# Altium PCB PCB1.PcbDoc (part 6 of 7)
Units mil, origin at the board's own origin, x right, y up, seen from the top; angles counter-clockwise.
Board outline 7650 x 4400 mil, 2 copper layers (Top Layer, Bottom Layer); 123 components, 190 nets, 788 pads, 165 vias.
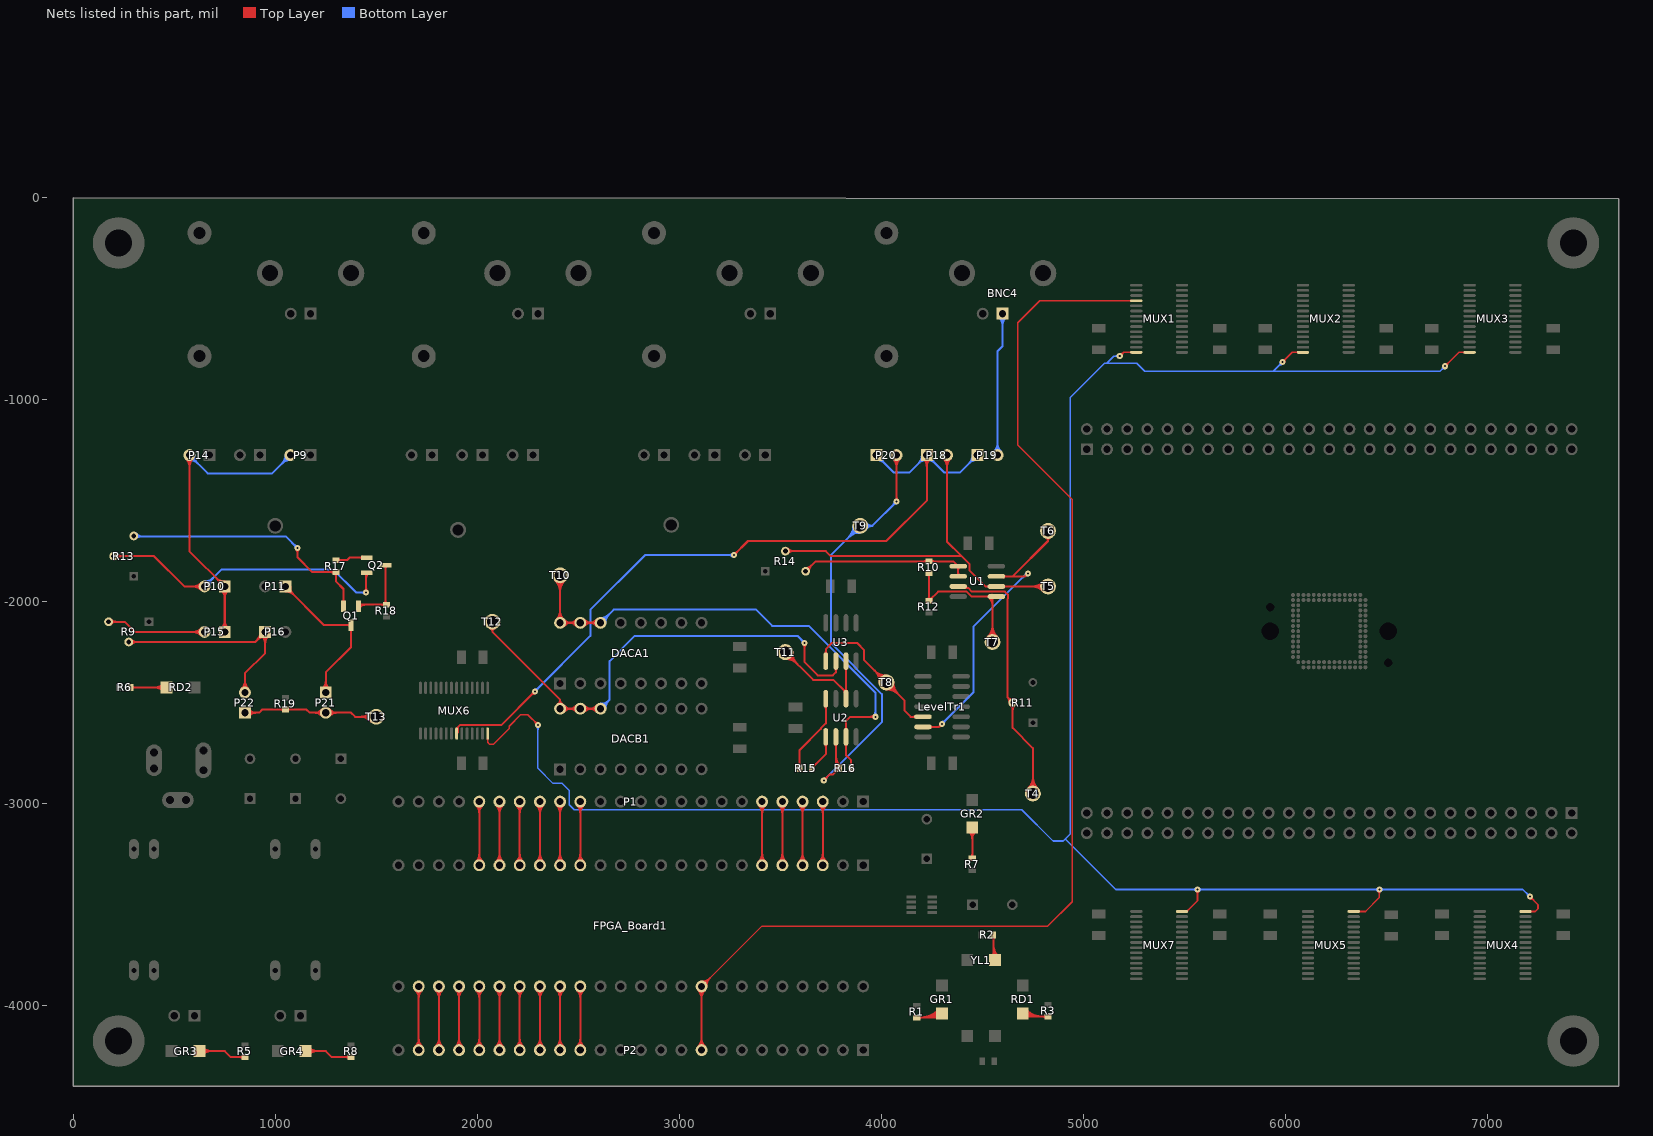
[diagram p6: the nets of this part, all layers, seen from the top]

## Via types
v1: diameter 30, hole 10, Top Layer to Bottom Layer, 118 vias
v2: diameter 20, hole 6, Top Layer to Bottom Layer, 47 vias

## Nets (pads, with @x,y where several pads share a name; then routed paths per layer and width w, separated by ;. In a path a pad name is that pad's centre, name@x,y a point inside that pad or via, vN(x,y) a via of type N, cw(c..) or ccw(c..) an arc to the next point about the centre after c; other vN are vias at no path point) (continued)
NetBNC4_1: BNC4.1 P19.2 | length 1006.6
  Bottom Layer w10: P19.2@4557.66,-1257.66 ccw(c4515.79,-1215.79) 4575,-1215.79 ccw(c4634.21,-1215.79) P19.2@4592.34,-1257.66 ; P19.2@4564.73,-1264.73 ccw(c4539.93,-1239.93) 4575,-1239.93 ccw(c4610.07,-1239.93) P19.2@4585.27,-1264.73 ; P19.2@4575,-1275 4575,-760 4600,-735 BNC4.1@4600,-575 ; BNC4.1@4582.66,-592.34 cw(c4540.79,-634.21) 4600,-634.21 cw(c4659.21,-634.21) BNC4.1@4617.34,-592.34 ; BNC4.1@4589.73,-585.27 cw(c4564.93,-610.07) 4600,-610.07 cw(c4635.07,-610.07) BNC4.1@4610.27,-585.27
NetDACA1_14: DACA1.14 DACA1.15 DACA1.16 R16.1 T10.1 U2.3 | length 3782.6
  Top Layer w10: T10.1@2385.7,-1894.3 cw(c2327.02,-1952.98) 2410,-1952.98 cw(c2492.98,-1952.98) T10.1@2434.3,-1894.3 ; DACA1.16@2392.66,-2087.66 ccw(c2350.78,-2045.79) 2410,-2045.79 ccw(c2469.21,-2045.79) 2427.34,-2087.66 ccw(c2469.21,-2045.79) 2469.21,-2105 ccw(c2469.21,-2164.22) DACA1.16@2427.34,-2122.34 ; T10.1@2392.77,-1887.23 cw(c2351.17,-1928.83) 2410,-1928.83 cw(c2468.84,-1928.84) T10.1@2427.23,-1887.23 ; DACA1.16@2399.73,-2094.73 ccw(c2374.93,-2069.93) 2410,-2069.93 ccw(c2445.07,-2069.93) 2420.27,-2094.73 ccw(c2445.07,-2069.93) 2445.07,-2105 ccw(c2445.07,-2140.07) DACA1.16@2420.27,-2115.27 ; T10.1@2410,-1870 DACA1.16@2410,-2105 DACA1.15@2510,-2105 DACA1.14@2610,-2105 ; DACA1.15@2492.66,-2122.34 ccw(c2450.78,-2164.22) 2450.78,-2105 ccw(c2450.78,-2045.79) DACA1.15@2492.66,-2087.66 ; DACA1.15@2499.73,-2115.27 ccw(c2474.93,-2140.07) 2474.93,-2105 ccw(c2474.93,-2069.93) DACA1.15@2499.73,-2094.73 ; DACA1.15@2520.27,-2115.27 cw(c2545.07,-2140.07) 2545.07,-2105 cw(c2545.07,-2069.93) DACA1.15@2520.27,-2094.73 ; DACA1.15@2527.34,-2122.34 cw(c2569.21,-2164.22) 2569.21,-2105 cw(c2569.21,-2045.79) DACA1.15@2527.34,-2087.66 ; DACA1.14@2592.66,-2122.34 ccw(c2550.78,-2164.22) 2550.78,-2105 ccw(c2550.78,-2045.79) DACA1.14@2592.66,-2087.66 ; DACA1.14@2599.73,-2115.27 ccw(c2574.93,-2140.07) 2574.93,-2105 ccw(c2574.93,-2069.93) DACA1.14@2599.73,-2094.73 ; U2.3@3820.18,-2705.8 cw(c3808.56,-2717.43) 3825,-2717.43 cw(c3841.44,-2717.43) U2.3@3829.82,-2705.8 ; U2.3@3820.18,-2633.18 ccw(c3808.56,-2621.55) 3825,-2621.55 ccw(c3841.44,-2621.55) U2.3@3829.82,-2633.18 ; R16.1@3843.79,-2814.85 ccw(c3828.8,-2799.87) 3850,-2799.87 ccw(c3871.2,-2799.87) R16.1@3856.21,-2814.85 ; R16.1@3850,-2825 3850,-2785 3825,-2760 U2.3@3825,-2669.49 3825,-2590 3845,-2570 v1(3970,-2570) ; v1@3962.93,-2577.07 ccw(c3945.86,-2594.14) 3945.86,-2570 ccw(c3945.86,-2545.86) v1@3962.93,-2562.93
  Bottom Layer w10: DACA1.14@2610,-2105 2675,-2040 3380,-2040 3460,-2120 3640,-2120 3970,-2450 v1(3970,-2570) ; DACA1.14@2610,-2090.47 ccw(c2610,-2055.4) 2634.8,-2080.2 ccw(c2659.6,-2105) DACA1.14@2624.53,-2105 ; DACA1.14@2610,-2080.47 ccw(c2610,-2021.26) 2651.87,-2063.13 ccw(c2693.74,-2105) DACA1.14@2634.53,-2105 ; v1@3962.93,-2562.93 ccw(c3945.86,-2545.86) 3970,-2545.86 ccw(c3994.14,-2545.86) v1@3977.07,-2562.93
NetDACB1_14: DACB1.14 DACB1.15 DACB1.16 T12.1 U3.2 | length 3338.7
  Top Layer w10: T12.1@2062.69,-2132.09 cw(c2055.82,-2150) 2075,-2150 ; T12.1@2075,-2100 2075,-2150 ; T12.1@2087.31,-2132.09 ccw(c2094.18,-2150) 2075,-2150 ; DACB1.16@2396.71,-2509.39 ccw(c2380.99,-2485) 2410,-2485 ; DACB1.16@2420.27,-2540.27 cw(c2445.07,-2565.07) 2445.07,-2530 cw(c2445.07,-2494.93) DACB1.16@2420.27,-2519.73 ; DACB1.16@2423.29,-2509.39 cw(c2439.01,-2485) 2410,-2485 ; DACB1.16@2427.34,-2547.34 cw(c2469.21,-2589.21) 2469.21,-2530 cw(c2469.21,-2470.79) DACB1.16@2427.34,-2512.66 ; DACB1.15@2492.66,-2547.34 ccw(c2450.79,-2589.21) 2450.79,-2530 ccw(c2450.79,-2470.79) DACB1.15@2492.66,-2512.66 ; DACB1.15@2499.73,-2540.27 ccw(c2474.93,-2565.07) 2474.93,-2530 ccw(c2474.93,-2494.93) DACB1.15@2499.73,-2519.73 ; DACB1.15@2520.27,-2540.27 cw(c2545.07,-2565.07) 2545.07,-2530 cw(c2545.07,-2494.93) DACB1.15@2520.27,-2519.73 ; DACB1.15@2527.34,-2547.34 cw(c2569.21,-2589.21) 2569.21,-2530 cw(c2569.21,-2470.79) DACB1.15@2527.34,-2512.66 ; DACB1.14@2592.66,-2547.34 ccw(c2550.79,-2589.21) 2550.79,-2530 ccw(c2550.79,-2470.79) DACB1.14@2592.66,-2512.66 ; DACB1.14@2599.73,-2540.27 ccw(c2574.93,-2565.07) 2574.93,-2530 ccw(c2574.93,-2494.93) DACB1.14@2599.73,-2519.73 ; DACB1.14@2610,-2530 DACB1.15@2510,-2530 DACB1.16@2410,-2530 2410,-2485 ; v1@3612.93,-2212.07 cw(c3595.86,-2229.14) 3620,-2229.14 cw(c3644.14,-2229.14) v1@3627.07,-2212.07 ; v1(3620,-2205) 3620,-2300 3685,-2365 3760,-2365 3775,-2350 U3.2@3775,-2294.49 ; U3.2@3770.18,-2330.8 cw(c3758.56,-2342.43) 3775,-2342.43 cw(c3791.44,-2342.43) U3.2@3779.82,-2330.8 ; 2075,-2150 2410,-2485
  Bottom Layer w10: DACB1.14@2610,-2530 2655,-2485 2655,-2295 2780,-2170 3585,-2170 v1(3620,-2205) ; DACB1.14@2610,-2515.47 ccw(c2610,-2480.4) 2634.8,-2505.2 ccw(c2659.6,-2530) DACB1.14@2624.53,-2530 ; DACB1.14@2610,-2505.47 ccw(c2610,-2446.26) 2651.87,-2488.13 ccw(c2693.74,-2530) DACB1.14@2634.53,-2530 ; v1@3610,-2205 ccw(c3585.86,-2205) 3602.93,-2187.93 ccw(c3620,-2170.86) v1@3620,-2195
NetGR1_2: GR1.2 R1.2 | length 467.4
  Top Layer w10: R1.2@4175,-4059.06 4278.74,-4059.06 GR1.2@4300,-4037.8 ; R1.2@4185.15,-4065.26 cw(c4200.13,-4080.25) 4200.13,-4059.06 cw(c4200.13,-4037.86) R1.2@4185.15,-4052.85 ; R1.2@4189.46,-4059.06 ccw(c4189.46,-3927.26) GR1.2@4282.66,-4020.45 ; 4213.6,-4059.06 ccw(c4213.6,-3951.4) GR1.2@4289.73,-4027.52 ; 4237.74,-4059.06 ccw(c4237.74,-3975.54) GR1.2@4296.8,-4034.59 ; 4261.89,-4059.06 ccw(c4261.89,-3999.68) GR1.2@4303.87,-4041.66
NetGR2_2: GR2.2 R7.1 | length 333
  Top Layer w10: GR2.2@4432.66,-3136.24 cw(c4390.79,-3178.11) 4450,-3178.11 cw(c4509.21,-3178.11) GR2.2@4467.34,-3136.24 ; GR2.2@4439.73,-3129.17 cw(c4414.93,-3153.97) 4450,-3153.97 cw(c4485.07,-3153.97) GR2.2@4460.27,-3129.17 ; R7.1@4443.79,-3264.26 ccw(c4428.8,-3249.28) 4450,-3249.28 ccw(c4471.2,-3249.28) R7.1@4456.21,-3264.26 ; R7.1@4450,-3270.47 GR2.2@4450,-3118.9
NetGR3_2: GR3.2 R5.1 | length 418.6
  Top Layer w10: GR3.2@625,-4225 750,-4225 779.53,-4254.53 R5.1@850,-4254.53 ; GR3.2@635.27,-4235.27 cw(c660.07,-4260.07) 660.07,-4225 cw(c660.07,-4189.93) GR3.2@635.27,-4214.73 ; GR3.2@642.34,-4242.34 cw(c684.21,-4284.21) 684.21,-4225 cw(c684.21,-4165.79) GR3.2@642.34,-4207.66 ; R5.1@839.85,-4260.74 ccw(c824.87,-4275.72) 824.87,-4254.53 ccw(c824.87,-4233.33) R5.1@839.85,-4248.32
NetGR4_1: GR4.1 R8.1 | length 418.6
  Top Layer w10: GR4.1@1150,-4225 1250,-4225 1279.53,-4254.53 R8.1@1375,-4254.53 ; GR4.1@1160.27,-4235.27 cw(c1185.07,-4260.07) 1185.07,-4225 cw(c1185.07,-4189.93) GR4.1@1160.27,-4214.73 ; GR4.1@1167.34,-4242.34 cw(c1209.21,-4284.21) 1209.21,-4225 cw(c1209.21,-4165.79) GR4.1@1167.34,-4207.66 ; R8.1@1364.85,-4260.74 ccw(c1349.87,-4275.72) 1349.87,-4254.53 ccw(c1349.87,-4233.33) R8.1@1364.85,-4248.32
NetLevelTr1_12: LevelTr1.12 T8.1 U3.1 | length 1259.9
  Top Layer w10: U3.1@3720.18,-2258.18 ccw(c3708.56,-2246.55) 3725,-2246.55 ccw(c3741.44,-2246.55) U3.1@3729.82,-2258.18 ; U3.1@3725,-2294.49 3725,-2235 3755,-2205 3880,-2205 3915,-2240 3915,-2290 T8.1@4025,-2400 4115,-2490 4115,-2540 4145,-2570 LevelTr1.12@4206.02,-2570 ; T8.1@3990.63,-2400 ccw(c3907.65,-2400) 3966.33,-2341.33 ccw(c4025,-2282.65) T8.1@4025,-2365.63 ; T8.1@4000.63,-2400 ccw(c3941.8,-2400) 3983.4,-2358.4 ccw(c4025,-2316.8) T8.1@4025,-2375.63 ; T8.1@4025,-2434.37 cw(c4025,-2517.35) 4083.67,-2458.67 cw(c4142.35,-2400) T8.1@4059.37,-2400 ; T8.1@4025,-2424.37 cw(c4025,-2483.2) 4066.6,-2441.6 cw(c4108.2,-2400) T8.1@4049.37,-2400 ; LevelTr1.12@4169.71,-2574.82 ccw(c4158.08,-2586.44) 4158.08,-2570 ccw(c4158.08,-2553.56) LevelTr1.12@4169.71,-2565.18
NetLevelTr1_13: LevelTr1.13 T6.1 U1.7 | length 1744.6
  Top Layer w10: LevelTr1.13@4206.02,-2620 4285,-2620 ; v1@4290.05,-2605.96 cw(c4272.63,-2607.63) 4285,-2620 ; v1@4299.04,-2614.95 ccw(c4297.37,-2632.37) 4285,-2620 ; v1(4300,-2605) 4285,-2620 ; U1.7@4569.49,-1875 4650,-1875 ; U1.7@4605.8,-1879.82 cw(c4617.43,-1891.44) 4617.43,-1875 cw(c4617.43,-1858.56) U1.7@4605.8,-1870.18 ; v1@4715.05,-1860.96 cw(c4697.63,-1862.63) 4710,-1875 ; v1@4724.04,-1869.95 ccw(c4722.37,-1887.37) 4710,-1875 ; v1(4725,-1860) 4710,-1875 ; T6.1@4812.69,-1682.09 cw(c4805.82,-1700) 4825,-1700 ; T6.1@4825,-1650 4825,-1700 ; T6.1@4837.31,-1682.09 ccw(c4844.18,-1700) 4825,-1700 ; 4253.96,-2620 ccw(c4253.96,-2636.44) 4242.34,-2624.82 cw(c4253.96,-2636.44) 4253.96,-2620 ; 4253.96,-2620 cw(c4253.96,-2603.56) 4242.34,-2615.18 ccw(c4253.96,-2603.56) 4253.96,-2620 ; 4650,-1875 4710,-1875 ; 4650,-1875 4825,-1700
  Bottom Layer w10: v1(4300,-2605) 4455,-2450 4455,-2125 4720,-1860 v1(4725,-1860) ; v1@4300,-2595 ccw(c4300,-2570.86) 4317.07,-2587.93 ccw(c4334.14,-2605) v1@4310,-2605 ; 4699.39,-1880.61 cw(c4725,-1906.21) v1@4725,-1870 ; 4711.46,-1868.54 ccw(c4702.93,-1860) v1@4715,-1860
NetMUX1_28: MUX1.28 MUX2.28 MUX3.28 MUX4.28 MUX5.28 MUX6.28 MUX7.28 | length 11778.1
  Top Layer w8: MUX6.28@2051.34,-2653.19 2051.34,-2696.34 2060.67,-2705.67 2080,-2705.67 2157.5,-2628.17 2157.5,-2616.49 2213.99,-2560 2250,-2560 v1(2300,-2610) ; v1@2289,-2610 ccw(c2262.44,-2610) 2281.22,-2591.22 ccw(c2300,-2572.44) v1@2300,-2599 ; v1(5180,-785) 5198.66,-766.34 ; v1@5180.05,-774 ccw(c5180.17,-747.85) 5198.66,-766.34 ; v1@5191,-784.95 cw(c5217.15,-784.83) 5198.66,-766.34 ; MUX1.28@5261.81,-766.34 5198.66,-766.34 ; MUX7.28@5488.19,-3533.66 5511.34,-3533.66 5565,-3480 v1(5565,-3425) ; v1@5557.22,-3432.78 cw(c5538.44,-3451.56) 5565,-3451.56 cw(c5591.56,-3451.56) v1@5572.78,-3432.78 ; v1(5985,-815) 6033.66,-766.34 MUX2.28@6086.81,-766.34 ; v1@5985,-804 ccw(c5985,-777.44) 6003.78,-796.22 ccw(c6022.56,-815) v1@5996,-815 ; MUX5.28@6338.19,-3533.66 6396.34,-3533.66 6465,-3465 v1(6465,-3425) ; v1@6457.22,-3432.78 cw(c6438.44,-3451.56) 6465,-3451.56 cw(c6491.56,-3451.56) v1@6472.78,-3432.78 ; v1(6790,-835) 6858.66,-766.34 MUX3.28@6911.81,-766.34 ; v1@6790,-824 ccw(c6790,-797.44) 6808.78,-816.22 ccw(c6827.56,-835) v1@6801,-835 ; MUX4.28@7188.19,-3533.66 7236.34,-3533.66 7250,-3520 7250,-3500 v1(7210,-3460) ; v1@7210,-3471 cw(c7210,-3497.56) 7228.78,-3478.78 cw(c7247.56,-3460) v1@7221,-3460 ; 2051.34,-2683.79 ccw(c2044.36,-2683.79) 2049.3,-2678.85 cw(c2044.36,-2683.79) 2051.34,-2683.79 ; 2051.34,-2683.79 cw(c2058.32,-2683.79) 2053.38,-2678.85 ccw(c2058.32,-2683.79) 2051.34,-2683.79 ; 5231.21,-766.34 ccw(c5231.21,-759.36) 5236.15,-764.3 cw(c5231.21,-759.36) 5231.21,-766.34 ; 5231.21,-766.34 cw(c5231.21,-773.32) 5236.15,-768.38 ccw(c5231.21,-773.32) 5231.21,-766.34 ; 6056.21,-766.34 ccw(c6056.21,-759.36) 6061.15,-764.3 cw(c6056.21,-759.36) 6056.21,-766.34 ; 6056.21,-766.34 cw(c6056.21,-773.32) 6061.15,-768.38 ccw(c6056.21,-773.32) 6056.21,-766.34 ; 6368.79,-3533.66 ccw(c6368.79,-3540.64) 6363.85,-3535.7 cw(c6368.79,-3540.64) 6368.79,-3533.66 ; 6368.79,-3533.66 cw(c6368.79,-3526.69) 6363.85,-3531.62 ccw(c6368.79,-3526.69) 6368.79,-3533.66 ; 6881.21,-766.34 ccw(c6881.21,-759.36) 6886.15,-764.3 cw(c6881.21,-759.36) 6881.21,-766.34 ; 6881.21,-766.34 cw(c6881.21,-773.32) 6886.15,-768.38 ccw(c6881.21,-773.32) 6881.21,-766.34 ; 7218.79,-3533.66 ccw(c7218.79,-3540.64) 7213.85,-3535.7 cw(c7218.79,-3540.64) 7218.79,-3533.66 ; 7218.79,-3533.66 cw(c7218.79,-3526.69) 7213.85,-3531.62 ccw(c7218.79,-3526.69) 7218.79,-3533.66 ; MUX7.28@5514.7,-3533.66 cw(c5522.82,-3533.66) 5517.08,-3527.92 ccw(c5522.82,-3533.66) MUX7.28@5514.7,-3533.66
  Bottom Layer w8: v1@2292.22,-2617.78 cw(c2273.44,-2636.56) 2300,-2636.56 cw(c2326.56,-2636.56) v1@2307.78,-2617.78 ; v1(2300,-2610) 2300,-2825 2375,-2900 2420,-2900 2455,-2935 2455,-3005 2480,-3030 4695,-3030 4850,-3185 4900,-3185 4910,-3175 ; v1@5172.22,-792.78 ccw(c5153.44,-811.56) 5153.44,-785 ccw(c5153.44,-758.44) v1@5172.22,-777.22 ; v1(5180,-785) 5150,-785 5115,-820 ; v1@5557.22,-3432.78 ccw(c5538.44,-3451.56) 5538.44,-3425 ccw(c5538.44,-3398.44) v1@5557.22,-3417.22 ; v1@5572.78,-3432.78 cw(c5591.56,-3451.56) 5591.56,-3425 cw(c5591.56,-3398.44) v1@5572.78,-3417.22 ; v1@5974,-815 cw(c5947.44,-815) 5966.22,-833.78 cw(c5985,-852.56) v1@5985,-826 ; v1(5985,-815) 5940,-860 ; v1@6457.22,-3432.78 ccw(c6438.44,-3451.56) 6438.44,-3425 ccw(c6438.44,-3398.44) v1@6457.22,-3417.22 ; v1@6472.78,-3432.78 cw(c6491.56,-3451.56) 6491.56,-3425 cw(c6491.56,-3398.44) v1@6472.78,-3417.22 ; v1@6779,-835 cw(c6752.44,-835) 6771.22,-853.78 cw(c6790,-872.56) v1@6790,-846 ; v1(6790,-835) 6765,-860 5940,-860 ; v1@7199,-3460 ccw(c7172.44,-3460) 7191.22,-3441.22 ccw(c7210,-3422.44) v1@7210,-3449 ; v1(7210,-3460) 7175,-3425 v1(6465,-3425) v1(5565,-3425) 5160,-3425 4910,-3175 ; 4910,-3175 4935,-3150 4935,-990 5105,-820 5115,-820 ; 5115,-820 5263.62,-820 5303.62,-860 5940,-860
NetMUX6_22: MUX6.22 P18.1 P19.1 P20.1 | length 4720.2
  Top Layer w10: MUX6.22@1897.8,-2653.19 1903.5,-2647.49 1903.5,-2621.33 ; v1@2275,-2445 cw(c2250.86,-2445) 2267.93,-2462.07 cw(c2285,-2479.14) v1@2285,-2455 ; v1(2285,-2445) 2120.32,-2609.68 1915.15,-2609.68 1903.5,-2621.33 ; v1(3270,-1770) 3340,-1700 4025,-1700 4225,-1500 P18.1@4225,-1275 ; v1@3270,-1760 ccw(c3270,-1735.86) 3287.07,-1752.93 ccw(c3304.14,-1770) v1@3280,-1770 ; P18.1@4207.66,-1292.34 cw(c4165.79,-1334.21) 4225,-1334.21 cw(c4284.21,-1334.21) P18.1@4242.34,-1292.34 ; P18.1@4214.73,-1285.27 cw(c4189.93,-1310.07) 4225,-1310.07 cw(c4260.07,-1310.07) P18.1@4235.27,-1285.27 ; 1903.5,-2621.33 cw(c1897.12,-2621.33) 1897.64,-2627.68 ccw(c1897.12,-2621.33) 1903.5,-2621.33 ; MUX6.22@1898.46,-2637.65 ccw(c1898.01,-2632.18) 1903.5,-2632.18 cw(c1898.01,-2632.18) MUX6.22@1898.46,-2637.65 ; MUX6.22@1899.27,-2647.62 ccw(c1898.9,-2643.04) 1903.5,-2643.04 cw(c1898.9,-2643.04) MUX6.22@1899.27,-2647.62 ; MUX6.22@1899.68,-2629.57 cw(c1910.37,-2629.57) 1902.82,-2622.01 ccw(c1910.37,-2629.57) MUX6.22@1899.68,-2629.57
  Bottom Layer w10: v1(2285,-2445) 2560,-2170 2560,-2040 2830,-1770 v1(3270,-1770) ; v1@2285,-2435 ccw(c2285,-2410.86) 2302.07,-2427.93 ccw(c2319.14,-2445) v1@2295,-2445 ; v1@3262.93,-1777.07 ccw(c3245.86,-1794.14) 3245.86,-1770 ccw(c3245.86,-1745.86) v1@3262.93,-1762.93 ; P20.1@3975,-1299.53 cw(c3975,-1358.74) 4016.87,-1316.87 cw(c4058.74,-1275) P20.1@3999.53,-1275 ; P20.1@3975,-1289.53 cw(c3975,-1324.6) 3999.8,-1299.8 cw(c4024.6,-1275) P20.1@3989.53,-1275 ; P20.1@3975,-1275 4060,-1360 4140,-1360 P18.1@4225,-1275 4310,-1360 4390,-1360 P19.1@4475,-1275 ; P18.1@4200.47,-1275 cw(c4141.26,-1275) 4183.13,-1316.87 cw(c4225,-1358.74) 4225,-1299.53 cw(c4225,-1358.74) 4266.87,-1316.87 cw(c4308.74,-1275) P18.1@4249.53,-1275 ; P18.1@4210.47,-1275 cw(c4175.4,-1275) 4200.2,-1299.8 cw(c4225,-1324.6) 4225,-1289.53 cw(c4225,-1324.6) 4249.8,-1299.8 cw(c4274.6,-1275) P18.1@4239.53,-1275 ; P19.1@4450.47,-1275 cw(c4391.26,-1275) 4433.13,-1316.87 cw(c4475,-1358.74) P19.1@4475,-1299.53 ; P19.1@4460.47,-1275 cw(c4425.4,-1275) 4450.2,-1299.8 cw(c4475,-1324.6) P19.1@4475,-1289.53
NetP9_2: P9.2 P10.1 P14.2 P15.1 | length 2410.7
  Top Layer w10: P14.2@557.66,-1292.34 cw(c515.79,-1334.21) 575,-1334.21 cw(c634.21,-1334.21) P14.2@592.34,-1292.34 ; P14.2@564.73,-1285.27 cw(c539.93,-1310.07) 575,-1310.07 cw(c610.07,-1310.07) P14.2@585.27,-1285.27 ; P14.2@575,-1275 575,-1750 P10.1@750,-1925 P15.1@750,-2150 ; P10.1@725.47,-1925 ccw(c666.26,-1925) 708.13,-1883.13 ccw(c750,-1841.26) P10.1@750,-1900.47 ; P15.1@732.66,-2132.66 ccw(c690.79,-2090.79) 750,-2090.79 ccw(c809.21,-2090.79) P15.1@767.34,-2132.66 ; P10.1@732.66,-1942.34 cw(c690.79,-1984.21) 750,-1984.21 cw(c809.21,-1984.21) P10.1@767.34,-1942.34 ; P10.1@735.47,-1925 ccw(c700.4,-1925) 725.2,-1900.2 ccw(c750,-1875.4) P10.1@750,-1910.47 ; P15.1@739.73,-2139.73 ccw(c714.93,-2114.93) 750,-2114.93 ccw(c785.07,-2114.93) P15.1@760.27,-2139.73 ; P10.1@739.73,-1935.27 cw(c714.93,-1960.07) 750,-1960.07 cw(c785.07,-1960.07) P10.1@760.27,-1935.27
  Bottom Layer w10: P14.2@575,-1299.53 cw(c575,-1358.74) 616.87,-1316.87 cw(c658.74,-1275) P14.2@599.53,-1275 ; P14.2@575,-1289.53 cw(c575,-1324.6) 599.8,-1299.8 cw(c624.6,-1275) P14.2@589.53,-1275 ; P14.2@575,-1275 665,-1365 985,-1365 P9.2@1075,-1275 ; P9.2@1050.47,-1275 cw(c991.26,-1275) 1033.13,-1316.87 cw(c1075,-1358.74) P9.2@1075,-1299.53 ; P9.2@1060.47,-1275 cw(c1025.4,-1275) 1050.2,-1299.8 cw(c1075,-1324.6) P9.2@1075,-1289.53
NetP10_2: P10.2 Q2.3 R13.2 | length 1952.3
  Top Layer w10: R13.2@200,-1775 400,-1775 550,-1925 P10.2@650,-1925 ; R13.2@211.78,-1786.78 cw(c240.21,-1815.21) 240.21,-1775 cw(c240.21,-1734.79) R13.2@211.78,-1763.22 ; P10.2@632.66,-1942.34 ccw(c590.79,-1984.21) 590.79,-1925 ccw(c590.79,-1865.79) P10.2@632.66,-1907.66 ; P10.2@639.73,-1935.27 ccw(c614.93,-1960.07) 614.93,-1925 ccw(c614.93,-1889.93) P10.2@639.73,-1914.73 ; v1@1442.93,-1947.93 ccw(c1425.86,-1930.86) 1450,-1930.86 ccw(c1474.14,-1930.86) v1@1457.07,-1947.93 ; v1(1450,-1955) 1450,-1861.14 Q2.3@1453.74,-1857.4 ; 1450,-1882.87 cw(c1479.21,-1882.87) Q2.3@1458.56,-1862.22
  Bottom Layer w10: P10.2@650,-1925 735,-1840 1285,-1840 1400,-1955 v1(1450,-1955) ; P10.2@650,-1910.47 ccw(c650,-1875.4) 674.8,-1900.2 ccw(c699.6,-1925) P10.2@664.53,-1925 ; P10.2@650,-1900.47 ccw(c650,-1841.26) 691.87,-1883.13 ccw(c733.74,-1925) P10.2@674.53,-1925 ; v1@1442.93,-1962.07 ccw(c1425.86,-1979.14) 1425.86,-1955 ccw(c1425.86,-1930.86) v1@1442.93,-1947.93
NetP11_1: P11.1 P21.1 Q1.3 | length 1189.3
  Top Layer w10: P11.1@1050,-1949.53 cw(c1050,-2008.74) 1091.87,-1966.87 cw(c1133.74,-1925) P11.1@1074.53,-1925 ; P11.1@1050,-1939.53 cw(c1050,-1974.6) 1074.8,-1949.8 cw(c1099.6,-1925) P11.1@1064.53,-1925 ; P11.1@1050,-1925 1241.26,-2116.26 Q1.3@1375,-2116.26 1375,-2225 1250,-2350 P21.1@1250,-2450 ; P21.1@1232.66,-2432.66 ccw(c1190.79,-2390.79) 1250,-2390.79 ccw(c1309.21,-2390.79) P21.1@1267.34,-2432.66 ; P21.1@1239.73,-2439.73 ccw(c1214.93,-2414.93) 1250,-2414.93 ccw(c1285.07,-2414.93) P21.1@1260.27,-2439.73 ; 1358.56,-2116.26 ccw(c1358.56,-2099.82) 1370.18,-2111.44 cw(c1358.56,-2099.82) 1358.56,-2116.26 ; 1358.56,-2116.26 cw(c1358.56,-2132.7) 1370.18,-2121.08 ccw(c1358.56,-2132.7) 1358.56,-2116.26 ; 1375,-2149.44 ccw(c1358.56,-2149.44) 1370.18,-2137.81 cw(c1358.56,-2149.44) 1375,-2149.44 ; 1375,-2149.44 cw(c1391.44,-2149.44) 1379.82,-2137.81 ccw(c1391.44,-2149.44) 1375,-2149.44
NetP15_2: P15.2 R9.3 | length 707
  Top Layer w10: R9.3@175,-2100 255,-2100 305,-2150 P15.2@650,-2150 ; R9.3@186.78,-2111.78 cw(c215.21,-2140.21) 215.21,-2100 cw(c215.21,-2059.79) R9.3@186.78,-2088.22 ; P15.2@632.66,-2167.34 ccw(c590.79,-2209.21) 590.79,-2150 ccw(c590.79,-2090.79) P15.2@632.66,-2132.66 ; P15.2@639.73,-2160.27 ccw(c614.93,-2185.07) 614.93,-2150 ccw(c614.93,-2114.93) P15.2@639.73,-2139.73
NetP16_1: P16.1 P22.2 R9.2 | length 1544.6
  Top Layer w10: R9.2@275,-2200 900,-2200 P16.1@950,-2150 950,-2255 850,-2355 P22.2@850,-2450 ; R9.2@286.78,-2211.78 cw(c315.21,-2240.21) 315.21,-2200 cw(c315.21,-2159.79) R9.2@286.78,-2188.22 ; P22.2@832.66,-2432.66 ccw(c790.79,-2390.79) 850,-2390.79 ccw(c909.21,-2390.79) P22.2@867.34,-2432.66 ; P22.2@839.73,-2439.73 ccw(c814.93,-2414.93) 850,-2414.93 ccw(c885.07,-2414.93) P22.2@860.27,-2439.73 ; P16.1@925.47,-2150 cw(c866.26,-2150) 908.13,-2191.87 cw(c950,-2233.74) P16.1@950,-2174.53 ; P16.1@932.66,-2167.34 cw(c890.79,-2209.21) 950,-2209.21 cw(c1009.21,-2209.21) P16.1@967.34,-2167.34 ; P16.1@935.47,-2150 cw(c900.4,-2150) 925.2,-2174.8 cw(c950,-2199.6) P16.1@950,-2164.53 ; P16.1@939.73,-2160.27 cw(c914.93,-2185.07) 950,-2185.07 cw(c985.07,-2185.07) P16.1@960.27,-2160.27
NetP18_2: P18.2 R14.2 T5.1 U1.6 | length 2406.1
  Top Layer w10: R14.2@3525,-1750 3725,-1750 3750,-1775 3751.31,-1773.69 4395.79,-1773.69 ; R14.2@3536.78,-1761.78 cw(c3565.21,-1790.21) 3565.21,-1750 cw(c3565.21,-1709.79) R14.2@3536.78,-1738.22 ; P18.2@4307.66,-1292.34 cw(c4265.79,-1334.21) 4325,-1334.21 cw(c4384.21,-1334.21) P18.2@4342.34,-1292.34 ; P18.2@4314.73,-1285.27 cw(c4289.93,-1310.07) 4325,-1310.07 cw(c4360.07,-1310.07) P18.2@4335.27,-1285.27 ; P18.2@4325,-1275 4325,-1702.9 4395.79,-1773.69 ; U1.6@4533.18,-1929.82 ccw(c4521.55,-1941.44) 4521.55,-1925 ccw(c4521.55,-1908.56) U1.6@4533.18,-1920.18 ; U1.6@4605.8,-1929.82 cw(c4617.43,-1941.44) 4617.43,-1925 cw(c4617.43,-1908.56) U1.6@4605.8,-1920.18 ; T5.1@4800.7,-1949.3 ccw(c4742.02,-2007.98) 4742.02,-1925 ccw(c4742.02,-1842.02) T5.1@4800.7,-1900.7 ; T5.1@4807.77,-1942.23 ccw(c4766.17,-1983.83) 4766.17,-1925 ccw(c4766.17,-1866.17) T5.1@4807.77,-1907.77 ; T5.1@4825,-1925 U1.6@4569.49,-1925 4515,-1925 4436.82,-1846.82 4436.82,-1814.72 4395.79,-1773.69
NetP20_2: P20.2 R16.2 T9.1 U2.2 | length 3118.8
  Top Layer w10: v1(3715,-2885) 3745,-2855 3760.94,-2855 R16.2@3790.94,-2825 3775,-2809.06 ; v1@3715,-2875 ccw(c3715,-2850.86) 3732.07,-2867.93 ccw(c3749.14,-2885) v1@3725,-2885 ; 3769.24,-2846.71 cw(c3790.94,-2868.42) R16.2@3790.94,-2837.72 ; U2.2@3770.18,-2705.8 cw(c3758.56,-2717.43) 3775,-2717.43 cw(c3791.44,-2717.43) U2.2@3779.82,-2705.8 ; 3775,-2809.66 ccw(c3802.35,-2809.66) R16.2@3783.01,-2829 ; 3775,-2785.52 ccw(c3826.49,-2785.52) R16.2@3790.08,-2821.93 ; 3775,-2761.37 ccw(c3850.63,-2761.37) R16.2@3797.15,-2814.85 ; U2.2@3775,-2669.49 3775,-2809.06 ; R16.2@3778.74,-2837.2 ccw(c3770.47,-2828.94) R16.2@3782.17,-2828.94 ; R16.2@3778.74,-2812.8 cw(c3770.47,-2821.06) R16.2@3782.17,-2821.06 ; R16.2@3788.58,-2812.61 cw(c3784.82,-2799.23) 3775,-2809.06 ; P20.2@4057.66,-1292.34 cw(c4015.79,-1334.21) 4075,-1334.21 cw(c4134.21,-1334.21) P20.2@4092.34,-1292.34 ; P20.2@4064.73,-1285.27 cw(c4039.93,-1310.07) 4075,-1310.07 cw(c4110.07,-1310.07) P20.2@4085.27,-1285.27 ; v1@4067.93,-1497.93 ccw(c4050.86,-1480.86) 4075,-1480.86 ccw(c4099.14,-1480.86) v1@4082.07,-1497.93 ; v1(4075,-1505) P20.2@4075,-1275
  Bottom Layer w10: v1(3715,-2885) 4003,-2597 4003,-2457.54 3750,-2204.54 3750,-1770 T9.1@3895,-1625 3955,-1625 ; v1@3715,-2875 ccw(c3715,-2850.86) 3732.07,-2867.93 ccw(c3749.14,-2885) v1@3725,-2885 ; T9.1@3860.63,-1625 cw(c3777.65,-1625) 3836.33,-1683.67 cw(c3895,-1742.35) T9.1@3895,-1659.37 ; T9.1@3870.63,-1625 cw(c3811.8,-1625) 3853.4,-1666.6 cw(c3895,-1708.2) T9.1@3895,-1649.37 ; T9.1@3916.02,-1637.33 cw(c3937.54,-1649.95) 3937.54,-1625 cw(c3937.54,-1600.05) T9.1@3916.02,-1612.67 ; T9.1@3924.65,-1642.39 cw(c3955,-1660.18) 3955,-1625 ; T9.1@3924.65,-1607.61 ccw(c3955,-1589.82) 3955,-1625 ; v1@4065,-1505 cw(c4040.86,-1505) 4057.93,-1522.07 cw(c4075,-1539.14) v1@4075,-1515 ; v1(4075,-1505) 3955,-1625
NetP21_2: P21.2 P22.1 R19.2 T13.1 | length 1405.2
  Top Layer w10: P22.1@850,-2550 920,-2550 935.94,-2534.06 R19.2@1050,-2534.06 1154.06,-2534.06 1170,-2550 P21.2@1250,-2550 1375,-2550 1395,-2570 T13.1@1500,-2570 ; P22.1@860.27,-2560.27 cw(c885.07,-2585.07) 885.07,-2550 cw(c885.07,-2514.93) P22.1@860.27,-2539.73 ; P22.1@867.34,-2567.34 cw(c909.21,-2609.21) 909.21,-2550 cw(c909.21,-2490.79) P22.1@867.34,-2532.66 ; R19.2@1039.85,-2540.26 ccw(c1024.87,-2555.25) 1024.87,-2534.06 ccw(c1024.87,-2512.86) R19.2@1039.85,-2527.85 ; R19.2@1060.15,-2540.26 cw(c1075.13,-2555.25) 1075.13,-2534.06 cw(c1075.13,-2512.86) R19.2@1060.15,-2527.85 ; P21.2@1232.66,-2567.34 ccw(c1190.79,-2609.21) 1190.79,-2550 ccw(c1190.79,-2490.79) P21.2@1232.66,-2532.66 ; P21.2@1239.73,-2560.27 ccw(c1214.93,-2585.07) 1214.93,-2550 ccw(c1214.93,-2514.93) P21.2@1239.73,-2539.73 ; P21.2@1260.27,-2560.27 cw(c1285.07,-2585.07) 1285.07,-2550 cw(c1285.07,-2514.93) P21.2@1260.27,-2539.73 ; P21.2@1267.34,-2567.34 cw(c1309.21,-2609.21) 1309.21,-2550 cw(c1309.21,-2490.79) P21.2@1267.34,-2532.66 ; T13.1@1475.7,-2594.3 ccw(c1417.02,-2652.98) 1417.02,-2570 ccw(c1417.02,-2487.02) T13.1@1475.7,-2545.7 ; T13.1@1482.77,-2587.23 ccw(c1441.17,-2628.83) 1441.17,-2570 ccw(c1441.17,-2511.17) T13.1@1482.77,-2552.77
NetQ1_1: Q1.1 Q2.1 R18.1 | length 507.5
  Top Layer w10: Q1.1@1410.15,-2021.49 cw(c1424.66,-2036) 1424.66,-2015.47 ; Q1.1@1412.4,-2023.74 1420.67,-2015.47 R18.1@1550,-2015.47 1546.26,-2011.73 Q2.1@1546.26,-1820 ; Q1.1@1417.22,-2028.56 cw(c1448.8,-2060.14) 1448.8,-2015.47 ; R18.1@1539.86,-2021.68 ccw(c1524.87,-2036.67) 1524.87,-2015.47 ccw(c1524.87,-1994.28) 1539.86,-2009.26 ccw(c1524.39,-1993.8) 1546.26,-1993.8 ; 1546.26,-1994.75 ccw(c1566.78,-1994.75) R18.1@1552.27,-2009.26 ; 1546.26,-1836.44 ccw(c1529.82,-1836.44) 1541.44,-1824.82 cw(c1529.82,-1836.44) 1546.26,-1836.44 ; 1546.26,-1836.44 cw(c1562.7,-1836.44) 1551.08,-1824.82 ccw(c1562.7,-1836.44) 1546.26,-1836.44
NetQ1_2: Q1.2 R13.3 R17.1 | length 1562
  Top Layer w10: v1@1102.93,-1742.07 cw(c1085.86,-1759.14) 1110,-1759.14 cw(c1134.14,-1759.14) v1@1117.07,-1742.07 ; v1(1110,-1735) 1110,-1780 1184.06,-1854.06 R17.1@1300,-1854.06 1300,-1900 1337.6,-1937.6 Q1.2@1337.6,-2023.74 ; R17.1@1289.85,-1860.26 ccw(c1274.87,-1875.25) 1274.87,-1854.06 ccw(c1274.87,-1832.86) R17.1@1289.85,-1847.85 ; R17.1@1293.79,-1860.26 cw(c1278.8,-1875.25) 1300,-1875.25 cw(c1321.2,-1875.25) R17.1@1306.21,-1860.26 ; 1337.6,-1990.56 ccw(c1354.04,-1990.56) 1342.41,-2002.19 cw(c1354.04,-1990.56) 1337.6,-1990.56 ; 1337.6,-1990.56 cw(c1321.16,-1990.56) 1332.78,-2002.19 ccw(c1321.16,-1990.56) 1337.6,-1990.56
  Bottom Layer w10: R13.3@300,-1675 302.37,-1677.37 1052.37,-1677.37 v1(1110,-1735) ; R13.3@304.7,-1670.3 ccw(c321.78,-1653.22) 321.78,-1677.37 ; R13.3@311.78,-1686.78 cw(c334.48,-1709.48) 334.48,-1677.37 ; R13.3@311.78,-1663.22 ccw(c345.93,-1629.07) 345.93,-1677.37 ; v1@1100,-1735 ccw(c1075.86,-1735) 1092.93,-1717.93 ccw(c1110,-1700.86) v1@1110,-1725
NetQ2_2: Q2.2 R17.2 | length 243.8
  Top Layer w10: R17.2@1300,-1795 1355,-1795 1367.4,-1782.6 Q2.2@1453.74,-1782.6 ; R17.2@1310.15,-1801.21 cw(c1325.13,-1816.2) 1325.13,-1795 cw(c1325.13,-1773.8) R17.2@1310.15,-1788.79 ; 1420.56,-1782.6 ccw(c1420.56,-1766.16) 1432.19,-1777.78 cw(c1420.56,-1766.16) 1420.56,-1782.6 ; 1420.56,-1782.6 cw(c1420.56,-1799.04) 1432.19,-1787.41 ccw(c1420.56,-1799.04) 1420.56,-1782.6
NetR2_2: R2.2 YL1.2 | length 335.2
  Top Layer w10: YL1.2@4545.45,-3757.66 ccw(c4523.54,-3735.75) 4554.53,-3735.75 ; R2.2@4548.32,-3660.14 cw(c4533.33,-3675.13) 4554.53,-3675.13 cw(c4575.72,-3675.13) R2.2@4560.74,-3660.14 ; 4554.53,-3744.11 ccw(c4593.69,-3744.11) YL1.2@4566,-3771.8 ; 4554.53,-3719.97 ccw(c4617.83,-3719.97) YL1.2@4573.07,-3764.73 ; 4554.53,-3695.83 ccw(c4641.97,-3695.83) YL1.2@4580.14,-3757.66 ; R2.2@4554.53,-3650 4554.53,-3766.73 YL1.2@4562.8,-3775
NetR3_2: R3.2 RD1.2 | length 417
  Top Layer w10: RD1.2@4696.13,-4041.66 ccw(c4727.18,-4010.61) RD1.2@4727.18,-4054.53 ; RD1.2@4700,-4037.8 4716.73,-4054.53 R3.2@4825,-4054.53 ; RD1.2@4703.2,-4034.59 ccw(c4751.33,-3986.47) 4751.33,-4054.53 ; RD1.2@4710.27,-4027.52 ccw(c4775.47,-3962.33) 4775.47,-4054.53 ; RD1.2@4717.34,-4020.45 ccw(c4799.61,-3938.19) 4799.61,-4054.53 ; R3.2@4814.86,-4060.74 ccw(c4799.87,-4075.72) 4799.87,-4054.53 ccw(c4799.87,-4033.33) R3.2@4814.86,-4048.32
NetR6_1: R6.1 RD2.2 | length 359.5
  Top Layer w10: R6.1@284.06,-2425 RD2.2@462.2,-2425 ; R6.1@290.26,-2431.21 cw(c305.25,-2446.2) 305.25,-2425 cw(c305.25,-2403.8) R6.1@290.26,-2418.79 ; RD2.2@444.86,-2442.34 ccw(c402.99,-2484.21) 402.99,-2425 ccw(c402.99,-2365.79) RD2.2@444.86,-2407.66 ; RD2.2@451.93,-2435.27 ccw(c427.13,-2460.07) 427.13,-2425 ccw(c427.13,-2389.93) RD2.2@451.93,-2414.73
NetR10_1: R10.1 R12.2 T7.1 U1.5 | length 1132.6
  Top Layer w10: R12.2@4228.79,-1989.74 ccw(c4213.8,-1974.75) 4235,-1974.75 ccw(c4256.2,-1974.75) R12.2@4241.21,-1989.74 ; R10.1@4228.79,-1865.74 cw(c4213.8,-1880.72) 4235,-1880.72 cw(c4256.2,-1880.72) R10.1@4241.21,-1865.74 ; R10.1@4235,-1859.53 R12.2@4235,-1995.94 4280.76,-1950.19 4422.28,-1950.19 4447.1,-1975 4550,-1975 T7.1@4550,-2200 ; R12.2@4238.94,-1987.17 ccw(c4238.94,-1975.48) R12.2@4247.2,-1983.74 ; R12.2@4247.72,-1995.94 cw(c4278.42,-1995.94) 4256.71,-1974.24 ; T7.1@4525.7,-2175.7 ccw(c4467.02,-2117.02) 4550,-2117.02 ccw(c4632.98,-2117.02) T7.1@4574.3,-2175.7 ; T7.1@4532.77,-2182.77 ccw(c4491.17,-2141.17) 4550,-2141.17 ccw(c4608.83,-2141.17) T7.1@4567.23,-2182.77 ; U1.5@4533.18,-1970.18 cw(c4521.55,-1958.56) 4521.55,-1975 cw(c4521.55,-1991.44) 4533.18,-1979.82 cw(c4492.56,-2020.43) 4550,-2020.43 ; U1.5@4540.25,-1972.75 cw(c4516.7,-1996.29) 4550,-1996.29 ; U1.5@4547.32,-1965.67 cw(c4540.84,-1972.15) U1.5@4550,-1972.15
NetR10_2: R10.2 R14.3 U1.1 U1.2 | length 1069.2
  Top Layer w10: R14.3@3625,-1850 3674.53,-1800.47 R10.2@4235,-1800.47 4355.98,-1800.47 U1.1@4380.51,-1825 U1.2@4380.51,-1875 ; R14.3@3625,-1833.35 ccw(c3625,-1793.14) 3653.43,-1821.57 ccw(c3681.86,-1850) R14.3@3641.65,-1850 ; R10.2@4224.85,-1806.68 ccw(c4209.87,-1821.67) 4209.87,-1800.47 ccw(c4209.87,-1779.28) R10.2@4224.85,-1794.26 ; R10.2@4245.14,-1806.68 cw(c4260.13,-1821.67) 4260.13,-1800.47 cw(c4260.13,-1779.28) R10.2@4245.14,-1794.26 ; 4380.51,-1858.56 ccw(c4396.95,-1858.56) 4385.33,-1870.18 cw(c4396.95,-1858.56) 4380.51,-1858.56 ; 4380.51,-1858.56 cw(c4364.07,-1858.56) 4375.7,-1870.18 ccw(c4364.07,-1858.56) 4380.51,-1858.56 ; 4380.51,-1841.44 ccw(c4364.07,-1841.44) 4375.7,-1829.82 cw(c4364.07,-1841.44) 4380.51,-1841.44 ; 4380.51,-1841.44 cw(c4396.95,-1841.44) 4385.33,-1829.82 ccw(c4396.95,-1841.44) 4380.51,-1841.44
NetR11_2: R11.2 T4.1 U1.3 | length 1651.7
  Top Layer w10: U1.3@4380.51,-1925 4387.7,-1932.19 4429.74,-1932.19 ; U1.3@4418.63,-1923.42 ccw(c4429.74,-1920.77) 4429.74,-1932.19 ; R11.2@4633.42,-2498.42 ccw(c4604.35,-2495.65) 4625,-2475 ; R11.2@4638.22,-2511.78 cw(c4609.79,-2540.21) 4650,-2540.21 cw(c4690.21,-2540.21) R11.2@4661.78,-2511.78 ; R11.2@4648.42,-2483.42 cw(c4645.65,-2454.35) 4625,-2475 ; T4.1@4725.7,-2925.7 ccw(c4667.02,-2867.02) 4750,-2867.02 ccw(c4832.98,-2867.02) T4.1@4774.3,-2925.7 ; T4.1@4732.77,-2932.77 ccw(c4691.17,-2891.17) 4750,-2891.17 ccw(c4808.83,-2891.17) T4.1@4767.23,-2932.77 ; T4.1@4750,-2950 4750,-2725 4650,-2625 R11.2@4650,-2500 4625,-2475 ; 4429.74,-1932.19 4447.74,-1950.19 4611.26,-1950.19 4625.8,-1964.72 4625.8,-1985.28 4625,-1986.07 4625,-2475
NetR15_1: R15.1 U2.1 | length 243.8
  Top Layer w10: R15.1@3654.53,-2825 3725,-2754.53 U2.1@3725,-2669.49 ; R15.1@3654.53,-2812.28 ccw(c3654.53,-2781.58) 3676.24,-2803.29 ; R15.1@3663.31,-2821.06 cw(c3675,-2821.06) R15.1@3666.73,-2812.8 ; U2.1@3720.18,-2705.8 cw(c3708.56,-2717.43) 3725,-2717.43 cw(c3741.44,-2717.43) U2.1@3729.82,-2705.8
NetR15_2: R15.2 U2.8 | length 457.3
  Top Layer w10: R15.2@3589.26,-2814.86 ccw(c3574.28,-2799.87) 3595.47,-2799.87 ccw(c3616.67,-2799.87) R15.2@3601.68,-2814.86 ; R15.2@3595.47,-2825 3595.47,-2734.53 3700.19,-2629.81 3700.19,-2627.72 3725,-2602.9 U2.8@3725,-2480.51 ; U2.8@3720.18,-2516.82 cw(c3708.56,-2528.45) 3725,-2528.45 cw(c3741.44,-2528.45) U2.8@3729.82,-2516.82
NetT11_1: T11.1 U2.6 U3.3 | length 868.9
  Top Layer w10: T11.1@3525,-2284.37 cw(c3525,-2367.35) 3583.67,-2308.67 cw(c3642.35,-2250) T11.1@3559.37,-2250 ; T11.1@3525,-2274.37 cw(c3525,-2333.2) 3566.6,-2291.6 cw(c3608.2,-2250) T11.1@3549.37,-2250 ; T11.1@3525,-2250 3662,-2387 3762.46,-2387 U2.6@3825,-2449.54 ; 3812.47,-2437.01 ccw(c3825,-2424.49) U2.6@3825,-2442.2 ; 3813.75,-2438.29 cw(c3803.02,-2449.02) U2.6@3818.19,-2449.02 ; U2.6@3820.18,-2444.2 ccw(c3808.56,-2432.57) 3825,-2432.57 ccw(c3841.44,-2432.57) U2.6@3829.82,-2444.2 ; U3.3@3820.18,-2330.8 cw(c3808.56,-2342.43) 3825,-2342.43 cw(c3841.44,-2342.43) U3.3@3829.82,-2330.8 ; U2.6@3825,-2480.51 U2.6@3825,-2449.54 ; U3.3@3825,-2294.49 U2.6@3825,-2449.54
PIO03: FPGA_Board1.3 P1.3 | length 611.2
  Top Layer w10: FPGA_Board1.3@3692.66,-3287.66 ccw(c3650.79,-3245.79) 3710,-3245.79 ccw(c3769.21,-3245.79) FPGA_Board1.3@3727.34,-3287.66 ; P1.3@3692.66,-3007.34 cw(c3650.79,-3049.21) 3710,-3049.21 cw(c3769.21,-3049.21) P1.3@3727.34,-3007.34 ; FPGA_Board1.3@3699.73,-3294.73 ccw(c3674.93,-3269.93) 3710,-3269.93 ccw(c3745.07,-3269.93) FPGA_Board1.3@3720.27,-3294.73 ; P1.3@3699.73,-3000.27 cw(c3674.93,-3025.07) 3710,-3025.07 cw(c3745.07,-3025.07) P1.3@3720.27,-3000.27 ; FPGA_Board1.3@3710,-3305 P1.3@3710,-2990
PIO04: FPGA_Board1.4 P1.4 | length 611.2
  Top Layer w10: FPGA_Board1.4@3592.66,-3287.66 ccw(c3550.79,-3245.79) 3610,-3245.79 ccw(c3669.21,-3245.79) FPGA_Board1.4@3627.34,-3287.66 ; P1.4@3592.66,-3007.34 cw(c3550.79,-3049.21) 3610,-3049.21 cw(c3669.21,-3049.21) P1.4@3627.34,-3007.34 ; FPGA_Board1.4@3599.73,-3294.73 ccw(c3574.93,-3269.93) 3610,-3269.93 ccw(c3645.07,-3269.93) FPGA_Board1.4@3620.27,-3294.73 ; P1.4@3599.73,-3000.27 cw(c3574.93,-3025.07) 3610,-3025.07 cw(c3645.07,-3025.07) P1.4@3620.27,-3000.27 ; FPGA_Board1.4@3610,-3305 P1.4@3610,-2990
PIO05: FPGA_Board1.5 P1.5 | length 611.2
  Top Layer w10: FPGA_Board1.5@3492.66,-3287.66 ccw(c3450.79,-3245.79) 3510,-3245.79 ccw(c3569.21,-3245.79) FPGA_Board1.5@3527.34,-3287.66 ; P1.5@3492.66,-3007.34 cw(c3450.79,-3049.21) 3510,-3049.21 cw(c3569.21,-3049.21) P1.5@3527.34,-3007.34 ; FPGA_Board1.5@3499.73,-3294.73 ccw(c3474.93,-3269.93) 3510,-3269.93 ccw(c3545.07,-3269.93) FPGA_Board1.5@3520.27,-3294.73 ; P1.5@3499.73,-3000.27 cw(c3474.93,-3025.07) 3510,-3025.07 cw(c3545.07,-3025.07) P1.5@3520.27,-3000.27 ; FPGA_Board1.5@3510,-3305 P1.5@3510,-2990
PIO06: FPGA_Board1.6 P1.6 | length 611.2
  Top Layer w10: FPGA_Board1.6@3392.66,-3287.66 ccw(c3350.79,-3245.79) 3410,-3245.79 ccw(c3469.21,-3245.79) FPGA_Board1.6@3427.34,-3287.66 ; P1.6@3392.66,-3007.34 cw(c3350.79,-3049.21) 3410,-3049.21 cw(c3469.21,-3049.21) P1.6@3427.34,-3007.34 ; FPGA_Board1.6@3399.73,-3294.73 ccw(c3374.93,-3269.93) 3410,-3269.93 ccw(c3445.07,-3269.93) FPGA_Board1.6@3420.27,-3294.73 ; P1.6@3399.73,-3000.27 cw(c3374.93,-3025.07) 3410,-3025.07 cw(c3445.07,-3025.07) P1.6@3420.27,-3000.27 ; FPGA_Board1.6@3410,-3305 P1.6@3410,-2990
PIO15: FPGA_Board1.15 P1.15 | length 611.2
  Top Layer w10: FPGA_Board1.15@2492.66,-3287.66 ccw(c2450.79,-3245.79) 2510,-3245.79 ccw(c2569.21,-3245.79) FPGA_Board1.15@2527.34,-3287.66 ; P1.15@2492.66,-3007.34 cw(c2450.79,-3049.21) 2510,-3049.21 cw(c2569.21,-3049.21) P1.15@2527.34,-3007.34 ; FPGA_Board1.15@2499.73,-3294.73 ccw(c2474.93,-3269.93) 2510,-3269.93 ccw(c2545.07,-3269.93) FPGA_Board1.15@2520.27,-3294.73 ; P1.15@2499.73,-3000.27 cw(c2474.93,-3025.07) 2510,-3025.07 cw(c2545.07,-3025.07) P1.15@2520.27,-3000.27 ; FPGA_Board1.15@2510,-3305 P1.15@2510,-2990
PIO16: FPGA_Board1.16 P1.16 | length 611.2
  Top Layer w10: FPGA_Board1.16@2392.66,-3287.66 ccw(c2350.79,-3245.79) 2410,-3245.79 ccw(c2469.21,-3245.79) FPGA_Board1.16@2427.34,-3287.66 ; P1.16@2392.66,-3007.34 cw(c2350.79,-3049.21) 2410,-3049.21 cw(c2469.21,-3049.21) P1.16@2427.34,-3007.34 ; FPGA_Board1.16@2399.73,-3294.73 ccw(c2374.93,-3269.93) 2410,-3269.93 ccw(c2445.07,-3269.93) FPGA_Board1.16@2420.27,-3294.73 ; P1.16@2399.73,-3000.27 cw(c2374.93,-3025.07) 2410,-3025.07 cw(c2445.07,-3025.07) P1.16@2420.27,-3000.27 ; FPGA_Board1.16@2410,-3305 P1.16@2410,-2990
PIO17: FPGA_Board1.17 P1.17 | length 611.2
  Top Layer w10: FPGA_Board1.17@2292.66,-3287.66 ccw(c2250.79,-3245.79) 2310,-3245.79 ccw(c2369.21,-3245.79) FPGA_Board1.17@2327.34,-3287.66 ; P1.17@2292.66,-3007.34 cw(c2250.79,-3049.21) 2310,-3049.21 cw(c2369.21,-3049.21) P1.17@2327.34,-3007.34 ; FPGA_Board1.17@2299.73,-3294.73 ccw(c2274.93,-3269.93) 2310,-3269.93 ccw(c2345.07,-3269.93) FPGA_Board1.17@2320.27,-3294.73 ; P1.17@2299.73,-3000.27 cw(c2274.93,-3025.07) 2310,-3025.07 cw(c2345.07,-3025.07) P1.17@2320.27,-3000.27 ; FPGA_Board1.17@2310,-3305 P1.17@2310,-2990
PIO18: FPGA_Board1.18 P1.18 | length 611.2
  Top Layer w10: FPGA_Board1.18@2192.66,-3287.66 ccw(c2150.79,-3245.79) 2210,-3245.79 ccw(c2269.21,-3245.79) FPGA_Board1.18@2227.34,-3287.66 ; P1.18@2192.66,-3007.34 cw(c2150.79,-3049.21) 2210,-3049.21 cw(c2269.21,-3049.21) P1.18@2227.34,-3007.34 ; FPGA_Board1.18@2199.73,-3294.73 ccw(c2174.93,-3269.93) 2210,-3269.93 ccw(c2245.07,-3269.93) FPGA_Board1.18@2220.27,-3294.73 ; P1.18@2199.73,-3000.27 cw(c2174.93,-3025.07) 2210,-3025.07 cw(c2245.07,-3025.07) P1.18@2220.27,-3000.27 ; FPGA_Board1.18@2210,-3305 P1.18@2210,-2990
PIO19: FPGA_Board1.19 P1.19 | length 611.2
  Top Layer w10: FPGA_Board1.19@2092.66,-3287.66 ccw(c2050.79,-3245.79) 2110,-3245.79 ccw(c2169.21,-3245.79) FPGA_Board1.19@2127.34,-3287.66 ; P1.19@2092.66,-3007.34 cw(c2050.79,-3049.21) 2110,-3049.21 cw(c2169.21,-3049.21) P1.19@2127.34,-3007.34 ; FPGA_Board1.19@2099.73,-3294.73 ccw(c2074.93,-3269.93) 2110,-3269.93 ccw(c2145.07,-3269.93) FPGA_Board1.19@2120.27,-3294.73 ; P1.19@2099.73,-3000.27 cw(c2074.93,-3025.07) 2110,-3025.07 cw(c2145.07,-3025.07) P1.19@2120.27,-3000.27 ; FPGA_Board1.19@2110,-3305 P1.19@2110,-2990
PIO20: FPGA_Board1.20 P1.20 | length 611.2
  Top Layer w10: FPGA_Board1.20@1992.66,-3287.66 ccw(c1950.79,-3245.79) 2010,-3245.79 ccw(c2069.21,-3245.79) FPGA_Board1.20@2027.34,-3287.66 ; P1.20@1992.66,-3007.34 cw(c1950.79,-3049.21) 2010,-3049.21 cw(c2069.21,-3049.21) P1.20@2027.34,-3007.34 ; FPGA_Board1.20@1999.73,-3294.73 ccw(c1974.93,-3269.93) 2010,-3269.93 ccw(c2045.07,-3269.93) FPGA_Board1.20@2020.27,-3294.73 ; P1.20@1999.73,-3000.27 cw(c1974.93,-3025.07) 2010,-3025.07 cw(c2045.07,-3025.07) P1.20@2020.27,-3000.27 ; FPGA_Board1.20@2010,-3305 P1.20@2010,-2990
PIO26: FPGA_Board1.26 P2.23 | length 611.2
  Top Layer w10: P2.23@1692.66,-4202.66 ccw(c1650.79,-4160.79) 1710,-4160.79 ccw(c1769.21,-4160.79) P2.23@1727.34,-4202.66 ; FPGA_Board1.26@1692.66,-3922.34 cw(c1650.79,-3964.21) 1710,-3964.21 cw(c1769.21,-3964.21) FPGA_Board1.26@1727.34,-3922.34 ; P2.23@1699.73,-4209.73 ccw(c1674.93,-4184.93) 1710,-4184.93 ccw(c1745.07,-4184.93) P2.23@1720.27,-4209.73 ; FPGA_Board1.26@1699.73,-3915.27 cw(c1674.93,-3940.07) 1710,-3940.07 cw(c1745.07,-3940.07) FPGA_Board1.26@1720.27,-3915.27 ; P2.23@1710,-4220 FPGA_Board1.26@1710,-3905
PIO27: FPGA_Board1.27 P2.22 | length 611.2
  Top Layer w10: P2.22@1792.66,-4202.66 ccw(c1750.79,-4160.79) 1810,-4160.79 ccw(c1869.21,-4160.79) P2.22@1827.34,-4202.66 ; FPGA_Board1.27@1792.66,-3922.34 cw(c1750.79,-3964.21) 1810,-3964.21 cw(c1869.21,-3964.21) FPGA_Board1.27@1827.34,-3922.34 ; P2.22@1799.73,-4209.73 ccw(c1774.93,-4184.93) 1810,-4184.93 ccw(c1845.07,-4184.93) P2.22@1820.27,-4209.73 ; FPGA_Board1.27@1799.73,-3915.27 cw(c1774.93,-3940.07) 1810,-3940.07 cw(c1845.07,-3940.07) FPGA_Board1.27@1820.27,-3915.27 ; P2.22@1810,-4220 FPGA_Board1.27@1810,-3905
PIO28: FPGA_Board1.28 P2.21 | length 611.2
  Top Layer w10: P2.21@1892.66,-4202.66 ccw(c1850.79,-4160.79) 1910,-4160.79 ccw(c1969.21,-4160.79) P2.21@1927.34,-4202.66 ; FPGA_Board1.28@1892.66,-3922.34 cw(c1850.79,-3964.21) 1910,-3964.21 cw(c1969.21,-3964.21) FPGA_Board1.28@1927.34,-3922.34 ; P2.21@1899.73,-4209.73 ccw(c1874.93,-4184.93) 1910,-4184.93 ccw(c1945.07,-4184.93) P2.21@1920.27,-4209.73 ; FPGA_Board1.28@1899.73,-3915.27 cw(c1874.93,-3940.07) 1910,-3940.07 cw(c1945.07,-3940.07) FPGA_Board1.28@1920.27,-3915.27 ; P2.21@1910,-4220 FPGA_Board1.28@1910,-3905
PIO29: FPGA_Board1.29 P2.20 | length 611.2
  Top Layer w10: P2.20@1992.66,-4202.66 ccw(c1950.79,-4160.79) 2010,-4160.79 ccw(c2069.21,-4160.79) P2.20@2027.34,-4202.66 ; FPGA_Board1.29@1992.66,-3922.34 cw(c1950.79,-3964.21) 2010,-3964.21 cw(c2069.21,-3964.21) FPGA_Board1.29@2027.34,-3922.34 ; P2.20@1999.73,-4209.73 ccw(c1974.93,-4184.93) 2010,-4184.93 ccw(c2045.07,-4184.93) P2.20@2020.27,-4209.73 ; FPGA_Board1.29@1999.73,-3915.27 cw(c1974.93,-3940.07) 2010,-3940.07 cw(c2045.07,-3940.07) FPGA_Board1.29@2020.27,-3915.27 ; P2.20@2010,-4220 FPGA_Board1.29@2010,-3905
PIO30: FPGA_Board1.30 P2.19 | length 611.2
  Top Layer w10: P2.19@2092.66,-4202.66 ccw(c2050.79,-4160.79) 2110,-4160.79 ccw(c2169.21,-4160.79) P2.19@2127.34,-4202.66 ; FPGA_Board1.30@2092.66,-3922.34 cw(c2050.79,-3964.21) 2110,-3964.21 cw(c2169.21,-3964.21) FPGA_Board1.30@2127.34,-3922.34 ; P2.19@2099.73,-4209.73 ccw(c2074.93,-4184.93) 2110,-4184.93 ccw(c2145.07,-4184.93) P2.19@2120.27,-4209.73 ; FPGA_Board1.30@2099.73,-3915.27 cw(c2074.93,-3940.07) 2110,-3940.07 cw(c2145.07,-3940.07) FPGA_Board1.30@2120.27,-3915.27 ; P2.19@2110,-4220 FPGA_Board1.30@2110,-3905
PIO31: FPGA_Board1.31 P2.18 | length 611.2
  Top Layer w10: P2.18@2192.66,-4202.66 ccw(c2150.79,-4160.79) 2210,-4160.79 ccw(c2269.21,-4160.79) P2.18@2227.34,-4202.66 ; FPGA_Board1.31@2192.66,-3922.34 cw(c2150.79,-3964.21) 2210,-3964.21 cw(c2269.21,-3964.21) FPGA_Board1.31@2227.34,-3922.34 ; P2.18@2199.73,-4209.73 ccw(c2174.93,-4184.93) 2210,-4184.93 ccw(c2245.07,-4184.93) P2.18@2220.27,-4209.73 ; FPGA_Board1.31@2199.73,-3915.27 cw(c2174.93,-3940.07) 2210,-3940.07 cw(c2245.07,-3940.07) FPGA_Board1.31@2220.27,-3915.27 ; P2.18@2210,-4220 FPGA_Board1.31@2210,-3905
PIO32: FPGA_Board1.32 P2.17 | length 611.2
  Top Layer w10: P2.17@2292.66,-4202.66 ccw(c2250.79,-4160.79) 2310,-4160.79 ccw(c2369.21,-4160.79) P2.17@2327.34,-4202.66 ; FPGA_Board1.32@2292.66,-3922.34 cw(c2250.79,-3964.21) 2310,-3964.21 cw(c2369.21,-3964.21) FPGA_Board1.32@2327.34,-3922.34 ; P2.17@2299.73,-4209.73 ccw(c2274.93,-4184.93) 2310,-4184.93 ccw(c2345.07,-4184.93) P2.17@2320.27,-4209.73 ; FPGA_Board1.32@2299.73,-3915.27 cw(c2274.93,-3940.07) 2310,-3940.07 cw(c2345.07,-3940.07) FPGA_Board1.32@2320.27,-3915.27 ; P2.17@2310,-4220 FPGA_Board1.32@2310,-3905
PIO33: FPGA_Board1.33 P2.16 | length 611.2
  Top Layer w10: P2.16@2392.66,-4202.66 ccw(c2350.79,-4160.79) 2410,-4160.79 ccw(c2469.21,-4160.79) P2.16@2427.34,-4202.66 ; FPGA_Board1.33@2392.66,-3922.34 cw(c2350.79,-3964.21) 2410,-3964.21 cw(c2469.21,-3964.21) FPGA_Board1.33@2427.34,-3922.34 ; P2.16@2399.73,-4209.73 ccw(c2374.93,-4184.93) 2410,-4184.93 ccw(c2445.07,-4184.93) P2.16@2420.27,-4209.73 ; FPGA_Board1.33@2399.73,-3915.27 cw(c2374.93,-3940.07) 2410,-3940.07 cw(c2445.07,-3940.07) FPGA_Board1.33@2420.27,-3915.27 ; P2.16@2410,-4220 FPGA_Board1.33@2410,-3905
PIO34: FPGA_Board1.34 P2.15 | length 611.2
  Top Layer w10: P2.15@2492.66,-4202.66 ccw(c2450.79,-4160.79) 2510,-4160.79 ccw(c2569.21,-4160.79) P2.15@2527.34,-4202.66 ; FPGA_Board1.34@2492.66,-3922.34 cw(c2450.79,-3964.21) 2510,-3964.21 cw(c2569.21,-3964.21) FPGA_Board1.34@2527.34,-3922.34 ; P2.15@2499.73,-4209.73 ccw(c2474.93,-4184.93) 2510,-4184.93 ccw(c2545.07,-4184.93) P2.15@2520.27,-4209.73 ; FPGA_Board1.34@2499.73,-3915.27 cw(c2474.93,-3940.07) 2510,-3940.07 cw(c2545.07,-3940.07) FPGA_Board1.34@2520.27,-3915.27 ; P2.15@2510,-4220 FPGA_Board1.34@2510,-3905
S0: FPGA_Board1.40 MUX1.18 P2.9 | length 6414.4
  Top Layer w8: FPGA_Board1.40@3110,-3905 3409,-3606 4824,-3606 4945,-3485 4945,-1495 4675,-1225 4675,-620 4784.57,-510.43 MUX1.18@5261.81,-510.43 ; FPGA_Board1.40@3110,-3887.47 ccw(c3110,-3845.16) 3139.92,-3875.08 ccw(c3169.84,-3905) FPGA_Board1.40@3127.53,-3905 ; FPGA_Board1.40@3110,-3879.47 ccw(c3110,-3817.84) 3153.58,-3861.42 ccw(c3197.16,-3905) FPGA_Board1.40@3135.53,-3905 ; 5231.21,-510.43 ccw(c5231.21,-503.46) 5236.15,-508.39 cw(c5231.21,-503.46) 5231.21,-510.43 ; 5231.21,-510.43 cw(c5231.21,-517.41) 5236.15,-512.48 ccw(c5231.21,-517.41) 5231.21,-510.43
  Top Layer w10: P2.9@3092.66,-4202.66 ccw(c3050.79,-4160.79) 3110,-4160.79 ccw(c3169.21,-4160.79) P2.9@3127.34,-4202.66 ; FPGA_Board1.40@3092.66,-3922.34 cw(c3050.79,-3964.21) 3110,-3964.21 cw(c3169.21,-3964.21) FPGA_Board1.40@3127.34,-3922.34 ; P2.9@3099.73,-4209.73 ccw(c3074.93,-4184.93) 3110,-4184.93 ccw(c3145.07,-4184.93) P2.9@3120.27,-4209.73 ; FPGA_Board1.40@3099.73,-3915.27 cw(c3074.93,-3940.07) 3110,-3940.07 cw(c3145.07,-3940.07) FPGA_Board1.40@3120.27,-3915.27 ; P2.9@3110,-4220 FPGA_Board1.40@3110,-3905